# EAGLE board bga_example (EAGLE 8.0.0)
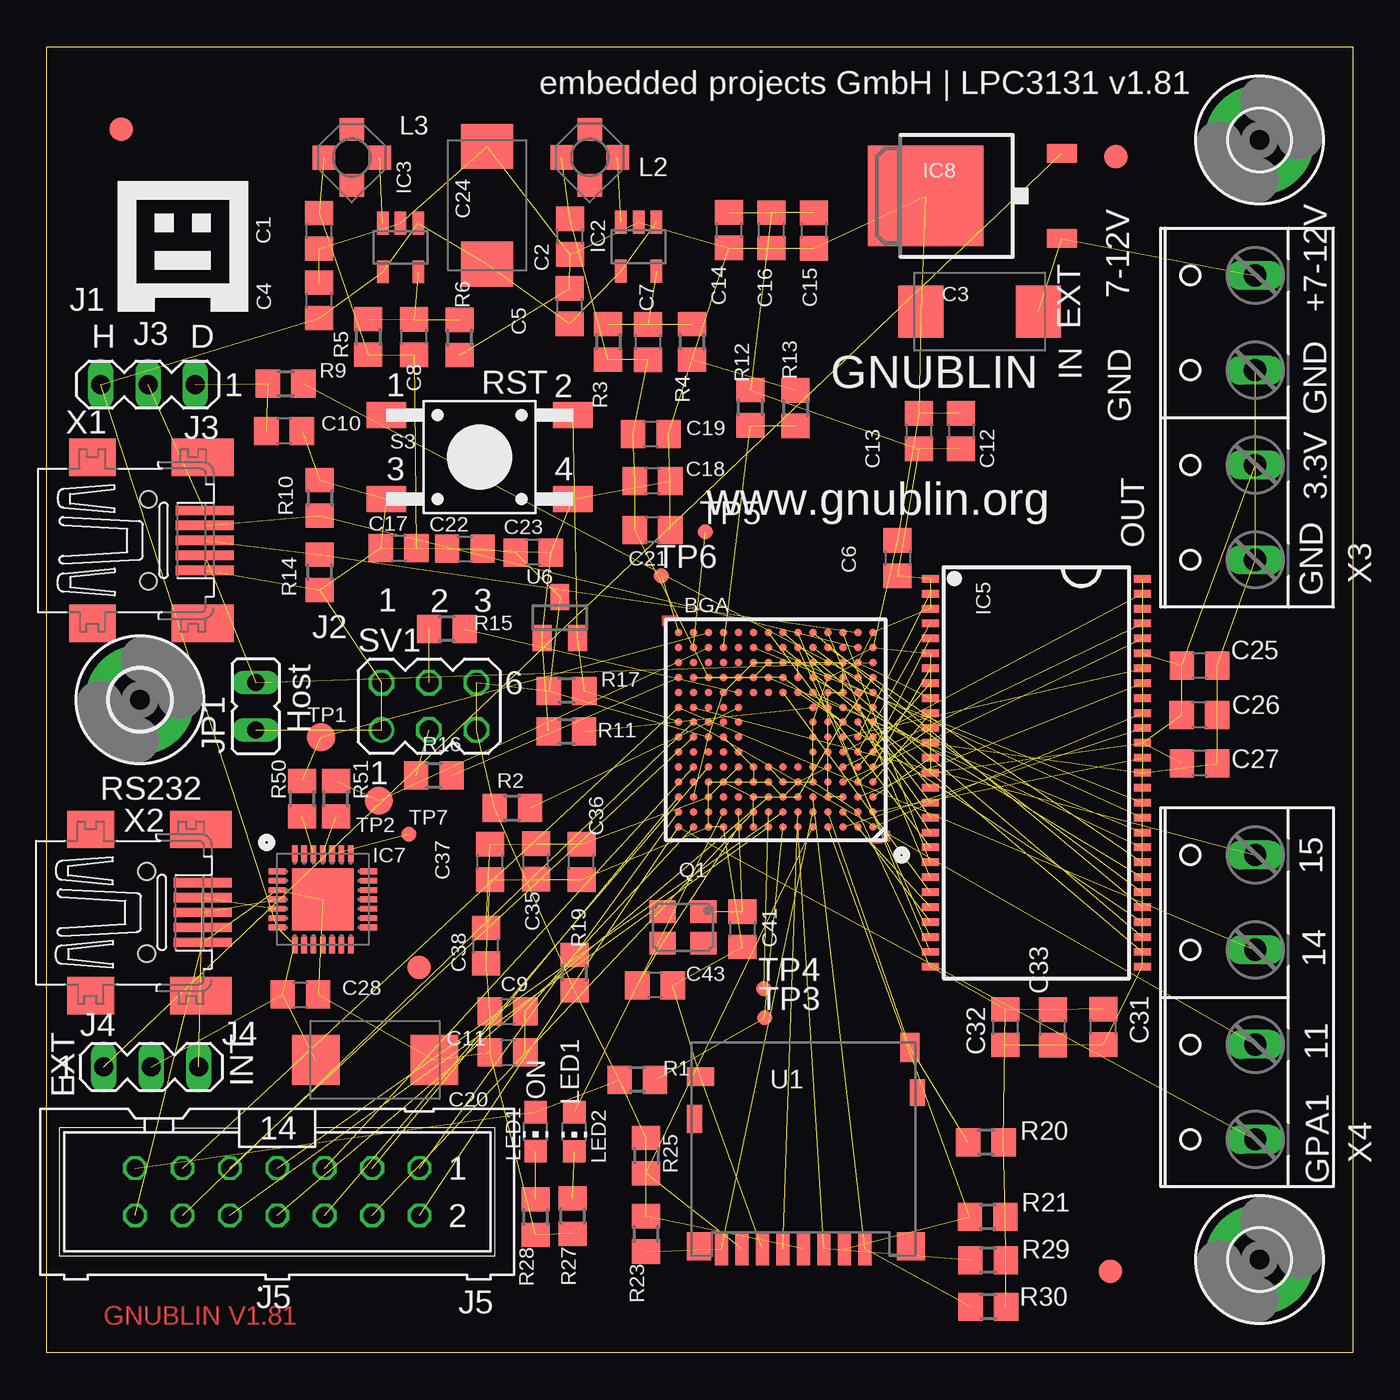
[diagram p0: board, top side]
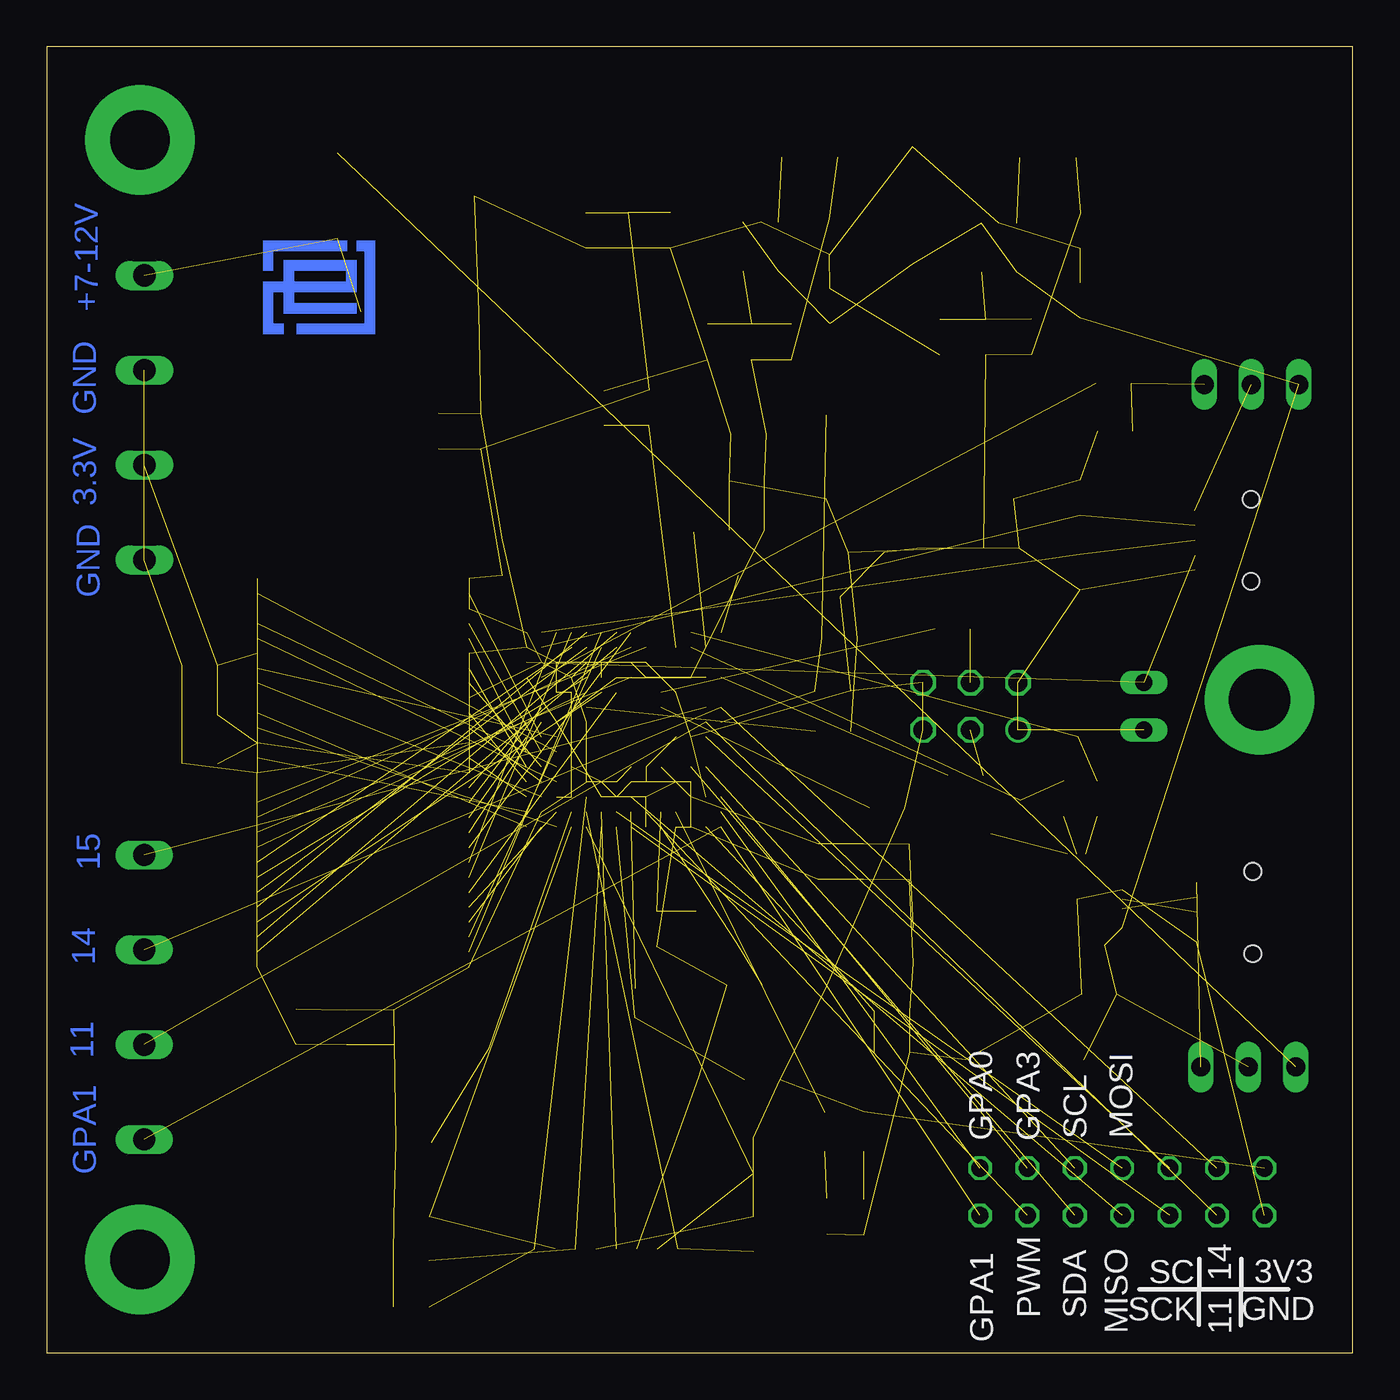
[diagram p1: board, bottom side, seen from below]

Size 70 x 70 mm. Coordinates in mm from the lower left corner, seen from the top.
Outline: 0,70 70,70 70,0 0,0 0,70
Copper layers (1*2*15*16): Top 0.012mm / dielectric 0.36mm / Route2 0.018mm / dielectric 0.71mm / Route15 0.035mm / dielectric 0.2mm / Bottom 0.012mm
Design rules "125um_0.2mmborhung_4Layer *": minimum track width 0.125mm, minimum drill 0.2mm, track to track 0.125mm, track to pad 0.125mm, pad to pad 0.125mm, via to via 0.125mm, smd to smd 0mil, copper to edge 0.45mm, drill to drill 0.3mm, minimum pad ring 0.175mm, minimum via ring 0.125mm, stop-mask expansion 2mil, vias tented up to drill 40mil, thermal gap 0.2mm
Net classes: 1 500mA: width 0.3 mm, drill 0.3 mm, clearance 0.15 mm
bRestrict: area 51.6,54.2 to 59.1,60

## Footprints (pad centres in the part's own frame; a part is rotated, then mirrored left to right if it is on the bottom)
TFBGA180 = smd 0.4 x 0.4: A1 -5.2,5.2; A2 -4.4,5.2; A3 -3.6,5.2; A4 -2.8,5.2; A5 -2,5.2; A6 -1.2,5.2; A7 -0.4,5.2; A8 0.4,5.2; A9 1.2,5.2; A10 2,5.2; A11 2.8,5.2; A12 3.6,5.2; A13 4.4,5.2; A14 5.2,5.2; B1 -5.2,4.4; B2 -4.4,4.4; B3 -3.6,4.4; B4 -2.8,4.4; B5 -2,4.4; B6 -1.2,4.4; B7 -0.4,4.4; B8 0.4,4.4; B9 1.2,4.4; B10 2,4.4; B11 2.8,4.4; B12 3.6,4.4; B13 4.4,4.4; B14 5.2,4.4; C1 -5.2,3.6; C2 -4.4,3.6; C3 -3.6,3.6; C4 -2.8,3.6; C5 -2,3.6; C6 -1.2,3.6; C7 -0.4,3.6; C8 0.4,3.6; C9 1.2,3.6; C10 2,3.6; C11 2.8,3.6; C12 3.6,3.6; C13 4.4,3.6; C14 5.2,3.6; D1 -5.2,2.8; D2 -4.4,2.8; D3 -3.6,2.8; D4 -2.8,2.8; D5 -2,2.8; D6 -1.2,2.8; D7 -0.4,2.8; D8 0.4,2.8; D9 1.2,2.8; D10 2,2.8; D11 2.8,2.8; D12 3.6,2.8; D13 4.4,2.8; D14 5.2,2.8; E1 -5.2,2; E2 -4.4,2; E3 -3.6,2; E4 -2.8,2; E5 -2,2; E6 -1.2,2; E7 -0.4,2; E8 0.4,2; E9 1.2,2; E10 2,2; E11 2.8,2; E12 3.6,2; E13 4.4,2; E14 5.2,2; F1 -5.2,1.2; F2 -4.4,1.2; F3 -3.6,1.2; F4 -2.8,1.2; F5 -2,1.2; F10 2,1.2; F11 2.8,1.2; F12 3.6,1.2; F13 4.4,1.2; F14 5.2,1.2; G1 -5.2,0.4; G2 -4.4,0.4; G3 -3.6,0.4; G4 -2.8,0.4; G5 -2,0.4; G10 2,0.4; G11 2.8,0.4; G12 3.6,0.4; G13 4.4,0.4; G14 5.2,0.4; H1 -5.2,-0.4; H2 -4.4,-0.4; H3 -3.6,-0.4; H4 -2.8,-0.4; H5 -2,-0.4; H10 2,-0.4; H11 2.8,-0.4; H12 3.6,-0.4; H13 4.4,-0.4; H14 5.2,-0.4; J1 -5.2,-1.2; J2 -4.4,-1.2; J3 -3.6,-1.2; J4 -2.8,-1.2; J5 -2,-1.2; J10 2,-1.2; J11 2.8,-1.2; J12 3.6,-1.2; J13 4.4,-1.2; J14 5.2,-1.2; K1 -5.2,-2; K2 -4.4,-2; K3 -3.6,-2; K4 -2.8,-2; K5 -2,-2; K6 -1.2,-2; K7 -0.4,-2; K8 0.4,-2; K9 1.2,-2; K10 2,-2; K11 2.8,-2; K12 3.6,-2; K13 4.4,-2; K14 5.2,-2; L1 -5.2,-2.8; L2 -4.4,-2.8; L3 -3.6,-2.8; L4 -2.8,-2.8; L5 -2,-2.8; L6 -1.2,-2.8; L7 -0.4,-2.8; L8 0.4,-2.8; L9 1.2,-2.8; L10 2,-2.8; L11 2.8,-2.8; L12 3.6,-2.8; L13 4.4,-2.8; L14 5.2,-2.8; M1 -5.2,-3.6; M2 -4.4,-3.6; M3 -3.6,-3.6; M4 -2.8,-3.6; M5 -2,-3.6; M6 -1.2,-3.6; M7 -0.4,-3.6; M8 0.4,-3.6; M9 1.2,-3.6; M10 2,-3.6; M11 2.8,-3.6; M12 3.6,-3.6; M13 4.4,-3.6; M14 5.2,-3.6; N1 -5.2,-4.4; N2 -4.4,-4.4; N3 -3.6,-4.4; N4 -2.8,-4.4; N5 -2,-4.4; N6 -1.2,-4.4; N7 -0.4,-4.4; N8 0.4,-4.4; N9 1.2,-4.4; N10 2,-4.4; N11 2.8,-4.4; N12 3.6,-4.4; N13 4.4,-4.4; N14 5.2,-4.4; P1 -5.2,-5.2; P2 -4.4,-5.2; P3 -3.6,-5.2; P4 -2.8,-5.2; P5 -2,-5.2; P6 -1.2,-5.2; P7 -0.4,-5.2; P8 0.4,-5.2; P9 1.2,-5.2; P10 2,-5.2; P11 2.8,-5.2; P12 3.6,-5.2; P13 4.4,-5.2; P14 5.2,-5.2
C0805 = smd 1.3 x 1.5: 1 -0.95,0; 2 0.95,0
SMC_D = smd 2.4 x 2.8: + -3.15,0; - 3.15,0
D/7343-31R = smd 2.55 x 2.7: + 3.175,0; - -3.175,0
PASSERMARKEN_FIDUCIAL = smd 1.27 x 1.27: 1 0,0
3,2-PAD = drill 3.2 pad 5.842: B3,2 0,0
3,3-PAD = drill 3.3 pad 5.842: B3,3 0,0
TSOT23 = smd 0.622 x 1.22: 1 -0.95,-1.31; 2 0,-1.31; 3 0.95,-1.31; 4 0.95,1.31; 5 -0.95,1.31
TSOPII = smd 0.4 x 0.9: 1 1.03,0.67; 2 1.83,0.67; 3 2.63,0.67; 4 3.43,0.67; 5 4.23,0.67; 6 5.03,0.67; 7 5.83,0.67; 8 6.63,0.67; 9 7.43,0.67; 10 8.23,0.67; 11 9.03,0.67; 12 9.83,0.67; 13 10.63,0.67; 14 11.43,0.67; 15 12.23,0.67; 16 13.03,0.67; 17 13.83,0.67; 18 14.63,0.67; 19 15.43,0.67; 20 16.23,0.67; 21 17.03,0.67; 22 17.83,0.67; 23 18.63,0.67; 24 19.43,0.67; 25 20.23,0.67; 26 21.03,0.67; 27 21.83,0.67; 28 21.83,12.03; 29 21.03,12.03; 30 20.23,12.03; 31 19.43,12.03; 32 18.63,12.03; 33 17.83,12.03; 34 17.03,12.03; 35 16.23,12.03; 36 15.43,12.03; 37 14.63,12.03; 38 13.83,12.03; 39 13.03,12.03; 40 12.23,12.03; 41 11.43,12.03; 42 10.63,12.03; 43 9.83,12.03; 44 9.03,12.03; 45 8.23,12.03; 46 7.43,12.03; 47 6.63,12.03; 48 5.83,12.03; 49 5.03,12.03; 50 4.23,12.03; 51 3.43,12.03; 52 2.63,12.03; 53 1.83,12.03; 54 1.03,12.03
MLP28 = smd 0.9 x 0.3: 1 -2.45,1.5; 2 -2.45,1; 3 -2.45,0.5; 4 -2.45,0; 5 -2.45,-0.5; 6 -2.45,-1; 7 -2.45,-1.5; 15 2.45,-1.5; 16 2.45,-1; 17 2.45,-0.5; 18 2.45,0; 19 2.45,0.5; 20 2.45,1; 21 2.45,1.5 | smd 0.3 x 0.9: 8 -1.5,-2.45; 9 -1,-2.45; 10 -0.5,-2.45; 11 0,-2.45; 12 0.5,-2.45; 13 1,-2.45; 14 1.5,-2.45; 22 1.5,2.45; 23 1,2.45; 24 0.5,2.45; 25 0,2.45; 26 -0.5,2.45; 27 -1,2.45; 28 -1.5,2.45 | smd 3.3 x 3.3: EXP 0,0
DPACK_3 = smd 1 x 1.6: 1 -2.28,-4.8; 3 2.28,-4.8 | smd 5.4 x 6.2: 4 0,2.5
MA03-1 = drill 1.016 long: 1 -2.54,0; 2 0,0; 3 2.54,0
ML14 = drill 0.914 octagon: 1 -7.62,-1.27; 2 -7.62,1.27; 3 -5.08,-1.27; 4 -5.08,1.27; 5 -2.54,-1.27; 6 -2.54,1.27; 7 0,-1.27; 8 0,1.27; 9 2.54,-1.27; 10 2.54,1.27; 11 5.08,-1.27; 12 5.08,1.27; 13 7.62,-1.27; 14 7.62,1.27
JP1 = drill 0.914 long: 1 0,-1.27; 2 0,1.27
PSU3014 = smd 1.2 x 1.3: 1 -1.5,0; 2 1.5,0 | smd 1.3 x 1.2: 3 0,1.5; 4 0,-1.5
CHIP-LED0805 = smd 1.2 x 1.2: A 0,-1.05; C 0,1.05
SX-32 = smd 1.4 x 1.2: 1 -1.1,-0.85; 2 1.1,-0.85; 3 1.1,0.85; 4 -1.1,0.85
R0805 = smd 1.3 x 1.5: 1 -0.95,0; 2 0.95,0
TASTER-9314_SMD = smd 2.1 x 1.4: 1 -5,2.25; 2 5,2.25; 3 -5,-2.25; 4 5,-2.25
MA03-2 = drill 1.016: 1 -2.54,-1.27 | drill 1.016 octagon: 2 -2.54,1.27; 3 0,-1.27; 4 0,1.27; 5 2.54,-1.27; 6 2.54,1.27
TP15R = smd 1.5 x 1.5: TP 0,0
TP08R = smd 0.8 x 0.8: TP 0,0
DM3D-SF = smd 0.7 x 1.75: 1 7.7,-0.875; 2 6.6,-0.875; 3 5.5,-0.875; 4 4.4,-0.875; 5 3.3,-0.875; 6 2.2,-0.875; 7 1.1,-0.875; 8 0,-0.875 | smd 1.3 x 1.5: P$1 -1.2,-0.75 | smd 1.5 x 1.5: P$10 10.15,-0.75 | smd 0.8 x 1.4: P$11 10.5,7.5 | smd 0.8 x 1.5: P$13 -1.45,6.1 | smd 1 x 1.55: SW_A 10.1,9.925 | smd 1.45 x 1: SW_B -1.125,8.35
SOT23 = smd 1 x 1.4: 1 -0.95,-1.1; 2 0.95,-1.1; 3 0,1.1
32005-201 = smd 3.1 x 0.5: 1 3,1.6; 2 3,0.8; 3 3,0; 4 3,-0.8; 5 3,-1.6 | smd 2.5 x 2: M1 -3,-4.45; M2 -3,4.45 | smd 3.3 x 2: M3 2.9,4.45; M4 2.9,-4.45 | hole 0.9: 0,2.2; 0,-2.2
W237-4P = drill 1.194 long: 1 -7.62,-0.635; 2 -2.54,-0.635; 3 2.54,-0.635; 4 7.62,-0.635

## Placement (x,y rotation side)
BGA  LPC313XFET180  [TFBGA180]  39.07,33.4 180 top
C1  10uF  [C0805]  14.6,60.12 90 top
C2  10uF  [C0805]  28.05,59.81 90 top
C3  10uF  [SMC_D]  50,55.8 180 top
C4  4.7uF  [C0805]  14.6,56.4 90 top
C5  4.7uF  [C0805]  28.03,56.09 90 top
C6  100nF  [C0805]  45.6,42.6 270 top
C7  22pF  [C0805]  32.24,54.17 90 top
C8  22pF  [C0805]  19.69,54.43 90 top
C9  100nF  [C0805]  24.7,18.3 0 top
C10  100nF  [C0805]  12.73,49.4 180 top
C11  10uF  [C0805]  24.7,16.1 0 top
C12  3.3nF  [C0805]  49,49.4 270 top
C13  10uF  [C0805]  46.73,49.39 270 top
C14  10uF  [C0805]  36.58,60.16 90 top
C15  3.3nF  [C0805]  41.13,60.14 90 top
C16  100nF  [C0805]  38.85,60.15 90 top
C17  3.3nF  [C0805]  18.86,43.13 0 top
C18  100nF  [C0805]  32.47,46.72 180 top
C19  3.3nF  [C0805]  32.38,49.23 180 top
C20  10uF  [D/7343-31R]  17.6,15.7 180 top
C21  10uF  [C0805]  32.47,44.1 180 top
C22  100nF  [C0805]  22.41,43.09 0 top
C23  10uF  [C0805]  26.07,42.9 180 top
C24  10uF  [SMC_D]  23.6,61.5 90 top
C25  3.3nF  [C0805]  61.79,36.83 180 top
C26  100nF  [C0805]  61.78,34.19 180 top
C27  10uF  [C0805]  61.78,31.6 180 top
C28  2.2uF  [C0805]  13.6,19.2 0 top
C31  3.3nF  [C0805]  56.63,17.47 90 top
C32  10uF  [C0805]  51.39,17.46 90 top
C33  100nF  [C0805]  53.92,17.44 90 top
C35  100nF  [C0805]  26.22,26.33 90 top
C36  3.3nF  [C0805]  28.66,26.31 90 top
C37  10uF  [C0805]  23.77,26.3 90 top
C38  100nF  [C0805]  23.54,21.82 90 top
C41  22pF  [C0805]  37.3,22.7 90 top
C43  22pF  [C0805]  32.6,19.7 180 top
FID1  [PASSERMARKEN_FIDUCIAL]  4,65.58 0 top
FID2  [PASSERMARKEN_FIDUCIAL]  57,4.36 0 top
FID3  [PASSERMARKEN_FIDUCIAL]  19.95,20.65 0 top
FID4  [PASSERMARKEN_FIDUCIAL]  57.3,64.1 0 top
H1  MOUNT-PAD-ROUND3.2  [3,2-PAD]  65,5 0 top
H2  MOUNT-PAD-ROUND3.3  [3,3-PAD]  5,35 0 top
H4  MOUNT-PAD-ROUND3.2  [3,2-PAD]  65,65 0 top
IC2  AS1324  [TSOT23]  31.72,59.28 180 top
IC3  AS1324  [TSOT23]  18.96,59.23 180 top
IC5  A43E26161TSOPII  [TSOPII]  46.69,42.52 270 top
IC7  CP21021  [MLP28]  14.8,24.3 0 top
IC8  MC78M05ABDT  [DPACK_3]  49.6,62 90 top
J3  [MA03-1]  5.43,51.89 180 top
J4  [MA03-1]  5.6,15.32 0 top
J5  [ML14]  12.36,8.63 180 top
JP1  [JP1]  11.2,34.65 0 top
L2  4u7  [PSU3014]  29.1,64.06 180 top
L3  4u7  [PSU3014]  16.35,64.05 180 top
LED1  GRUEN  [CHIP-LED0805]  26.2,11.86 180 top
LED2  ROT  [CHIP-LED0805]  28.28,11.85 180 top
Q1  SX-32 12.000 MHz  [SX-32]  34.1,22.8 180 top
R1  10K  [R0805]  31.65,14.64 180 top
R2  10K  [R0805]  24.95,29.2 0 top
R3  301K  [R0805]  30.09,54.17 270 top
R4  301K  [R0805]  34.59,54.17 90 top
R5  301K  [R0805]  17.23,54.45 270 top
R6  66K5  [R0805]  22.14,54.41 90 top
R9  10K  [R0805]  12.81,51.94 0 top
R10  1M  [R0805]  14.64,45.82 270 top
R11  12K 1%  [R0805]  27.85,33.31 0 top
R12  10K  [R0805]  37.72,50.65 90 top
R13  DNP  [R0805]  40.13,50.63 270 top
R14  1M  [R0805]  14.64,41.83 90 top
R15  10K  [R0805]  21.45,38.8 180 top
R16  10K  [R0805]  20.75,30.95 0 top
R17  10K  [R0805]  27.87,35.48 180 top
R19  22R  [R0805]  28.29,20.37 90 top
R20  10K  [R0805]  50.33,11.28 180 top
R21  10K  [R0805]  50.42,7.28 180 top
R23  10K  [R0805]  32.11,6.38 270 top
R25  10K  [R0805]  32.13,10.58 270 top
R27  270R  [R0805]  28.19,7.33 90 top
R28  270R  [R0805]  26.21,7.28 90 top
R29  10K  [R0805]  50.46,4.96 180 top
R30  10K  [R0805]  50.46,2.47 180 top
R50  0R  [R0805]  13.7,29.7 90 top
R51  0R  [R0805]  15.5,29.7 90 top
S3  [TASTER-9314_SMD]  23.2,48 0 top
SV1  [MA03-2]  20.49,34.65 0 top
TP1  TPTP15R  [TP15R]  14.71,33 0 top
TP2  TPTP15R  [TP15R]  17.81,29.6 0 top
TP3  PTR1TP08R  [TP08R]  38.47,17.96 0 top
TP4  PTR1TP08R  [TP08R]  38.44,19.52 0 top
TP5  TPTP08R  [TP08R]  35.3,44 0 top
TP6  TPTP08R  [TP08R]  32.95,41.65 0 top
TP7  TPTP08R  [TP08R]  19.4,27.8 0 top
U1  DM3D-SF  [DM3D-SF]  36.16,6.45 0 top
U6  APX803  [SOT23]  27.5,39.4 0 top
U$3  GNUBLINLOGOSIEB  [GNUSIEBDRUCK]  3.8,55.8 0 top
U$4  EPLOGO  [EPLOGOKUPFER]  58.4,54.6 0 bottom
X1  MINI-USB-32005-201  [32005-201]  5.46,43.54 0 top
X2  MINI-USB-32005-201  [32005-201]  5.36,23.6 0 top
X3  [W237-4P]  64.13,50.12 90 top
X4  [W237-4P]  64.14,19.06 90 top

## Library data of the parts
BGA = KUBUS3B; BGA: (LAYERS (2)(15))
C1-C28 C31-C33 C35-C38 C41 C43 R1-R6 R9-R17 R19-R21 R23 R25 R27-R30 R50 R51 = rcl
FID1 FID2 = KUBUS3
FID3 FID4 = SMDSCHABLONE
H1 H2 H4 = holes
IC2 IC3 L2 L3 U1 = KUBUS3B_PARTS2
IC5 = LPC3131
IC7 = CP2102; MF: FARNELL; MPN: CP2102-GM; OC_FARNELL: 9282130; OC_NEWARK: 30K5635
IC8 = linear
J3 J4 = con-lstb
J5 = con-ml
JP1 = jumper
LED1 LED2 = led
Q1 = KUBUS3B_PARTS2; FARNELL: 1712841
S3 = Ergaenzung
SV1 = con-lstb; OC_FARNELL: unknown; OC_NEWARK: unknown
TP1-TP7 = testpad
U6 = APX803
U$3 U$4 = EmbeddedProjectsLogos2
X1 X2 = con-cypressindustries
X3 X4 = con-wago-508

## Nets
5V [500mA]: C4.1 C5.1 C20.+ C24.+ C28.1 IC2.1 IC2.4 IC3.1 IC3.4 IC7.7 IC7.8 J3.3 J4.2
+1V2: BGA.A9 BGA.C6 BGA.C9 BGA.C12 BGA.D11 BGA.E10 BGA.H3 BGA.L1 BGA.L7 BGA.L12 C2.2 C7.1 C18.2 C19.2 C21.2 C35.2 C36.2 C37.2 C38.2 L2.2 R3.2
+3V3: BGA.B2 BGA.C13 BGA.D5 BGA.D7 BGA.E5 BGA.E8 BGA.F5 BGA.G5 BGA.G12 BGA.H5 BGA.K11 BGA.L4 BGA.L10 BGA.M2 BGA.M5 BGA.M7 BGA.M9 BGA.P1 C1.2 C6.2 C8.1 C12.2 C13.2 C14.2 C15.2 C16.2 C17.2 C22.2 C23.2 C25.2 C26.2 C27.2 C31.2 C32.2 C33.2 IC5.1 IC5.3 IC5.9 IC5.14 IC5.27 IC5.43 IC5.49 J5.13 L3.2 LED1.A R1.2 R2.1 R5.2 R12.2 R17.2 R19.1 R20.1 R21.1 R23.1 R25.1 R29.1 R30.1 SV1.5 SV1.6 U1.4 U6.3 X3.2
+5V_USB: J4.3 X2.1
+7-12V: C3.+ IC8.1 X3.4
D+: IC7.4 X2.3
D-: IC7.5 X2.2
EXT_5V: IC8.3 J4.1
GND: BGA.A11 BGA.A12 BGA.B12 BGA.C3 BGA.C4 BGA.C7 BGA.D6 BGA.D8 BGA.D9 BGA.D12 BGA.E4 BGA.E9 BGA.F4 BGA.G4 BGA.G11 BGA.H4 BGA.K3 BGA.K4 BGA.L3 BGA.L6 BGA.L9 BGA.L11 BGA.L13 BGA.M3 BGA.M4 BGA.M6 BGA.M8 BGA.N1 C1.1 C2.1 C3.- C4.2 C5.2 C6.1 C9.1 C10.1 C11.1 C12.1 C13.1 C14.1 C15.1 C16.1 C17.1 C18.1 C19.1 C20.- C21.1 C22.1 C23.1 C24.- C25.1 C26.1 C27.1 C28.2 C31.1 C32.1 C33.1 C35.1 C36.1 C37.1 C38.1 C41.1 C43.1 IC2.2 IC3.2 IC5.6 IC5.12 IC5.28 IC5.41 IC5.46 IC5.52 IC5.54 IC7.3 IC7.EXP IC8.4 J5.14 JP1.1 R4.1 R6.1 R10.1 R11.1 R13.1 R14.1 R27.1 R28.1 S3.3 S3.4 SV1.1 SV1.2 U1.6 U1.SW_B U6.1 X1.5 X2.5 X3.1 X3.3
GPA0: BGA.B14 J5.1
GPA1: BGA.A14 J5.2 X4.1
GPA3: BGA.C14 J5.3
GPIO0: BGA.K10 R15.1
GPIO2: BGA.L14 R16.2
GPIO11: BGA.H13 J5.12 X4.2
GPIO14: BGA.J14 J5.11 X4.3
GPIO15: BGA.J13 X4.4
GPIO19: BGA.H11
I2C_SCL: BGA.E13 J5.5
I2C_SDA: BGA.E12 J5.6
LED1: BGA.B11 LED2.A
LPC_A0: BGA.B3 IC5.23
LPC_A1: BGA.A2 IC5.24
LPC_A2: BGA.N6 IC5.25
LPC_A3: BGA.P6 IC5.26
LPC_A4: BGA.N7 IC5.29
LPC_A5: BGA.P7 IC5.30
LPC_A6: BGA.K6 IC5.31
LPC_A7: BGA.P5 IC5.32
LPC_A8: BGA.N5 IC5.33
LPC_A9: BGA.L5 IC5.34
LPC_A10: BGA.K7 IC5.22
LPC_A11: BGA.N4 IC5.35
LPC_A12: BGA.K5 IC5.36
LPC_A13: BGA.P4 IC5.21
LPC_A14: BGA.P3 IC5.20
LPC_A15: BGA.N3
LPC_CAS: BGA.G1 IC5.17
LPC_CKE: BGA.L8 IC5.37
LPC_CLK: BGA.N8 IC5.38
LPC_CS: BGA.P8 IC5.19
LPC_D0: BGA.G2 IC5.2
LPC_D1: BGA.F2 IC5.4
LPC_D2: BGA.F1 IC5.5
LPC_D3: BGA.E1 IC5.7
LPC_D4: BGA.E2 IC5.8
LPC_D5: BGA.D1 IC5.10
LPC_D6: BGA.D2 IC5.11
LPC_D7: BGA.C1 IC5.13
LPC_D8: BGA.B1 IC5.42
LPC_D9: BGA.A3 IC5.44
LPC_D10: BGA.A1 IC5.45
LPC_D11: BGA.C2 IC5.47
LPC_D12: BGA.G3 IC5.48
LPC_D13: BGA.D3 IC5.50
LPC_D14: BGA.E3 IC5.51
LPC_D15: BGA.F3 IC5.53
LPC_DM: BGA.N2 R10.2 X1.2
LPC_DP: BGA.P2 R14.2 X1.3
LPC_DQM0: BGA.H1 IC5.15
LPC_DQM1: BGA.N9 IC5.39
LPC_MCI_CD: BGA.B4 R20.2 U1.SW_A
LPC_MCI_CLK: BGA.B6 U1.5
LPC_MCI_CMD: BGA.A6 R29.2 U1.3
LPC_MCI_DAT0: BGA.A5 R25.2 U1.7
LPC_MCI_DAT1: BGA.B5 R23.2 U1.8
LPC_MCI_DAT2: BGA.C5 R30.2 U1.1
LPC_MCI_DAT3: BGA.A4 R21.2 U1.2
LPC_RAS: BGA.H2 IC5.18
LPC_RXD: BGA.P12 R50.2 TP1.TP
LPC_TXD: BGA.N12 R51.2 TP2.TP
LPC_VBUS: C10.2 J3.1 R9.1
LPC_WE: BGA.J2 IC5.16
N$1: IC7.26 R50.1
N$2: IC7.25 R51.1
N$3: LED2.C R27.2
N$7: LED1.C R28.2
N$8: IC2.3 L2.1
N$9: BGA.N11 R12.1 R13.2
N$10: J3.2 X1.1
N$16: BGA.K13
N$18: BGA.A7 R1.1 TP3.TP
N$19: BGA.B8 TP4.TP
N$20: BGA.K12
N$21: BGA.J11
N$22: BGA.B13
N$23: IC7.24 TP7.TP
N$24: BGA.J12
N$25: BGA.H10
N$26: BGA.J10 R2.2
N$27: R15.2 SV1.4
N$28: R16.1 SV1.3
N$29: BGA.N13 TP5.TP
N$30: BGA.P14 TP6.TP
N$38: C7.2 IC2.5 R3.1 R4.2
N$44: BGA.A13 C9.2 C11.2 R19.2
N$54: BGA.J5 R11.2
N$57: BGA.L2 R9.2
N$67: IC3.3 L3.1
N$132: C8.2 IC3.5 R5.1 R6.2
PWM_DATA: BGA.B9 J5.4
RESET: BGA.H14 R17.1 S3.2 U6.2
SPI_MISO: BGA.C8 J5.8
SPI_MOSI: BGA.B7 J5.7
SPI_SCK: BGA.A8 J5.10
SYSCLOCK_O: BGA.G13 J5.9
TCK: BGA.M14
TDI: BGA.K9
TDO: BGA.E11
TMS: BGA.P10
TRST_N: BGA.P13
USB_ID: BGA.M1 JP1.2 X1.4
VDD: IC7.6
XTAL1: BGA.A10 C43.2 Q1.3
XTAL2: BGA.B10 C41.2 Q1.1

## Tracks (layer width: path | path; a pad name or v marks a point on that pad's centre or on a via)
5V  (12 unrouted)
+1V2  (20 unrouted)
+3V3  (61 unrouted)
+5V_USB  (1 unrouted)
+7-12V  (2 unrouted)
D+  (1 unrouted)
D-  (1 unrouted)
EXT_5V  (1 unrouted)
GND  (95 unrouted)
GPA0  (1 unrouted)
GPA1  (2 unrouted)
GPA3  (1 unrouted)
GPIO0  (1 unrouted)
GPIO2  (1 unrouted)
GPIO11  (2 unrouted)
GPIO14  (2 unrouted)
GPIO15  (1 unrouted)
I2C_SCL  (1 unrouted)
I2C_SDA  (1 unrouted)
LED1  (1 unrouted)
LPC_A0  (1 unrouted)
LPC_A1  (1 unrouted)
LPC_A2  (1 unrouted)
LPC_A3  (1 unrouted)
LPC_A4  (1 unrouted)
LPC_A5  (1 unrouted)
LPC_A6  (1 unrouted)
LPC_A7  (1 unrouted)
LPC_A8  (1 unrouted)
LPC_A9  (1 unrouted)
LPC_A10  (1 unrouted)
LPC_A11  (1 unrouted)
LPC_A12  (1 unrouted)
LPC_A13  (1 unrouted)
LPC_A14  (1 unrouted)
LPC_CAS  (1 unrouted)
LPC_CKE  (1 unrouted)
LPC_CLK  (1 unrouted)
LPC_CS  (1 unrouted)
LPC_D0  (1 unrouted)
LPC_D1  (1 unrouted)
LPC_D2  (1 unrouted)
LPC_D3  (1 unrouted)
LPC_D4  (1 unrouted)
LPC_D5  (1 unrouted)
LPC_D6  (1 unrouted)
LPC_D7  (1 unrouted)
LPC_D8  (1 unrouted)
LPC_D9  (1 unrouted)
LPC_D10  (1 unrouted)
LPC_D11  (1 unrouted)
LPC_D12  (1 unrouted)
LPC_D13  (1 unrouted)
LPC_D14  (1 unrouted)
LPC_D15  (1 unrouted)
LPC_DM  (2 unrouted)
LPC_DP  (2 unrouted)
LPC_DQM0  (1 unrouted)
LPC_DQM1  (1 unrouted)
LPC_MCI_CD  (2 unrouted)
LPC_MCI_CLK  (1 unrouted)
LPC_MCI_CMD  (2 unrouted)
LPC_MCI_DAT0  (2 unrouted)
LPC_MCI_DAT1  (2 unrouted)
LPC_MCI_DAT2  (2 unrouted)
LPC_MCI_DAT3  (2 unrouted)
LPC_RAS  (1 unrouted)
LPC_RXD  (2 unrouted)
LPC_TXD  (2 unrouted)
LPC_VBUS  (2 unrouted)
LPC_WE  (1 unrouted)
N$1  (1 unrouted)
N$2  (1 unrouted)
N$3  (1 unrouted)
N$6
  Top 0.125: 33.77,39.45 33.04,39.45 33.04,39
N$7  (1 unrouted)
N$8  (1 unrouted)
N$9  (2 unrouted)
N$10  (1 unrouted)
N$11
  Top 0.125: 44.74,27.34 44.37,27.34
N$12
  Top 0.125: 45.14,27.44 45.14,27.93
N$18  (2 unrouted)
N$19  (1 unrouted)
N$23  (1 unrouted)
N$26  (1 unrouted)
N$27  (1 unrouted)
N$28  (1 unrouted)
N$29  (1 unrouted)
N$30  (1 unrouted)
N$38  (3 unrouted)
N$44  (3 unrouted)
N$54  (1 unrouted)
N$57  (1 unrouted)
N$67  (1 unrouted)
N$132  (3 unrouted)
PWM_DATA  (1 unrouted)
RESET  (3 unrouted)
SPI_MISO  (1 unrouted)
SPI_MOSI  (1 unrouted)
SPI_SCK  (1 unrouted)
SYSCLOCK_O  (1 unrouted)
USB_ID  (2 unrouted)
XTAL1  (2 unrouted)
XTAL2  (2 unrouted)

## Text on the board
Top: GNUBLIN V1.81
Bottom: +7-12V | GND | 3.3V | GND | 15 | 14 | 11 | GPA1
tPlace: embedded projects GmbH | LPC3131 v1.81 | +7-12V | 7-12V | EXT | J1 | H | J3 | D | IN | GND | GND | GNUBLIN | RST | 3.3V | OUT | www.gnublin.org | GND | 1 | 2 | 3 | J2 | Host | RS232 | 15 | 14 | 11 | EXT | INT | J4 | ON | GPA1 | LED1 | J5
bPlace: GPA3 | GPA0 | MOSI | SCL | 3V3 | SC | GPA1 | 14 | GND | SCK | SDA | PWM | 11 | MISO
tStop: 7